# Altium PCB Main PCB.PcbDoc
Units mm, origin at the board's own origin, x right, y up, seen from the top; angles counter-clockwise.
Board outline 180.47 x 110.74 mm, 2 copper layers (Top Layer, Bottom Layer); 53 components, 45 nets, 175 pads, 63 vias.
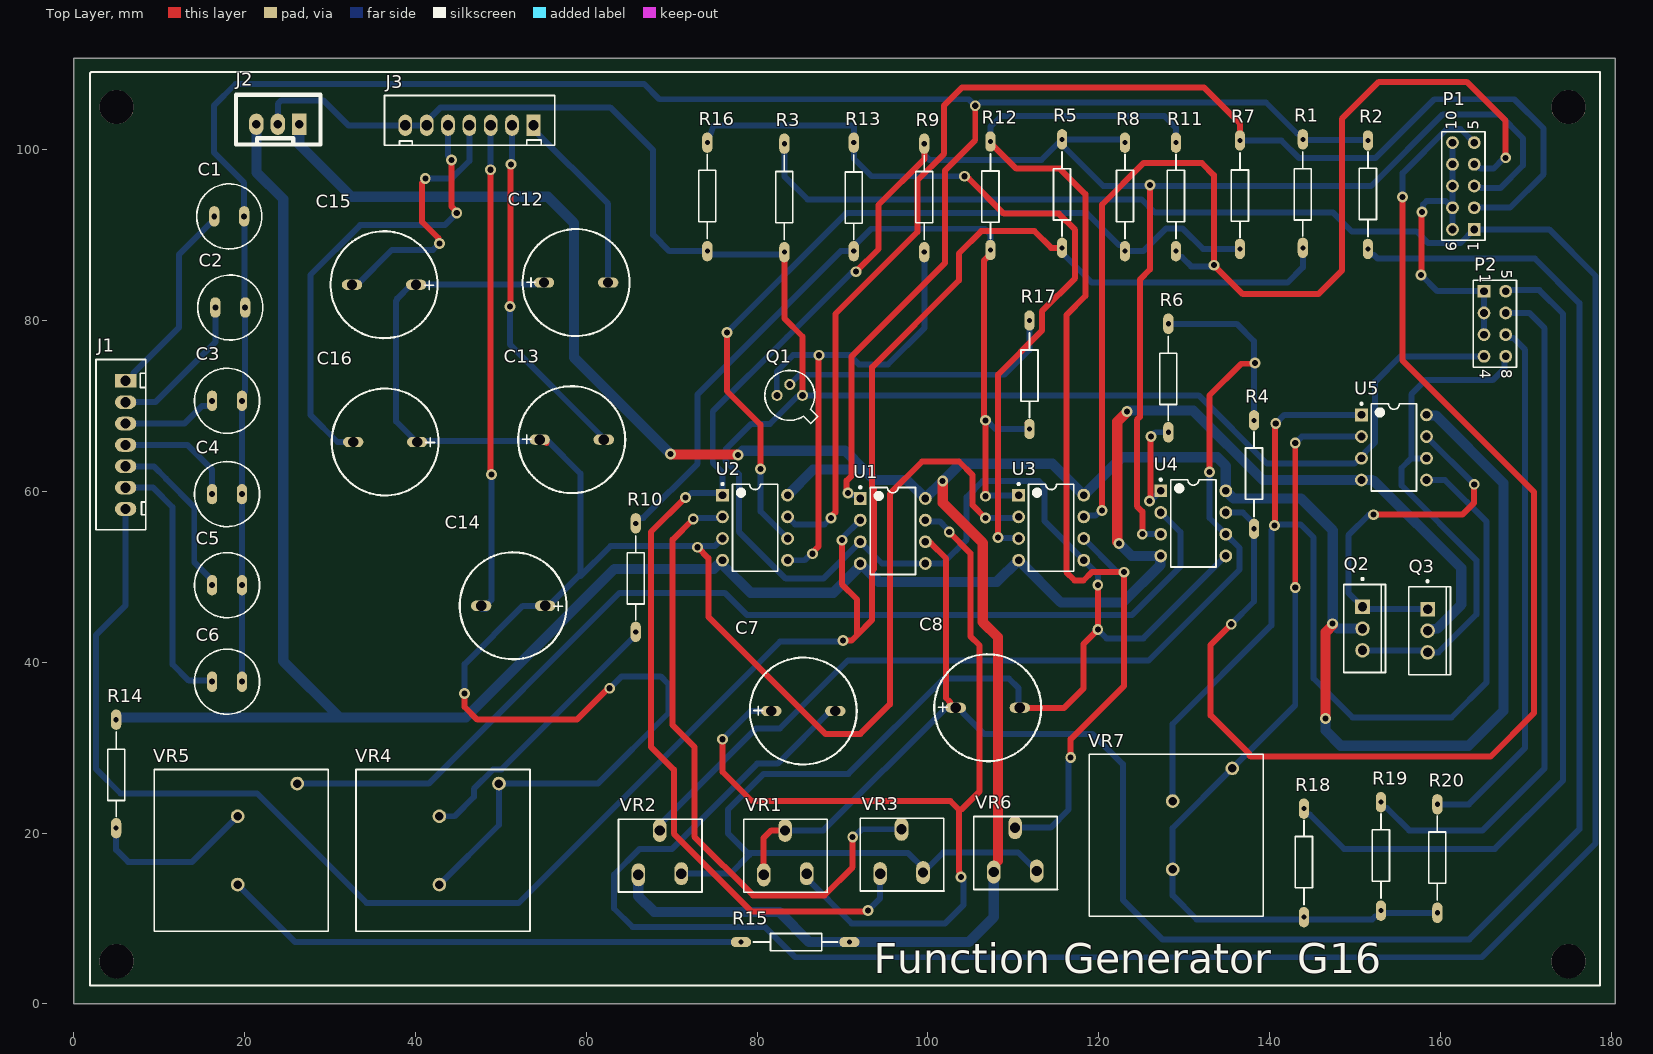
[diagram p0: Top Layer view]
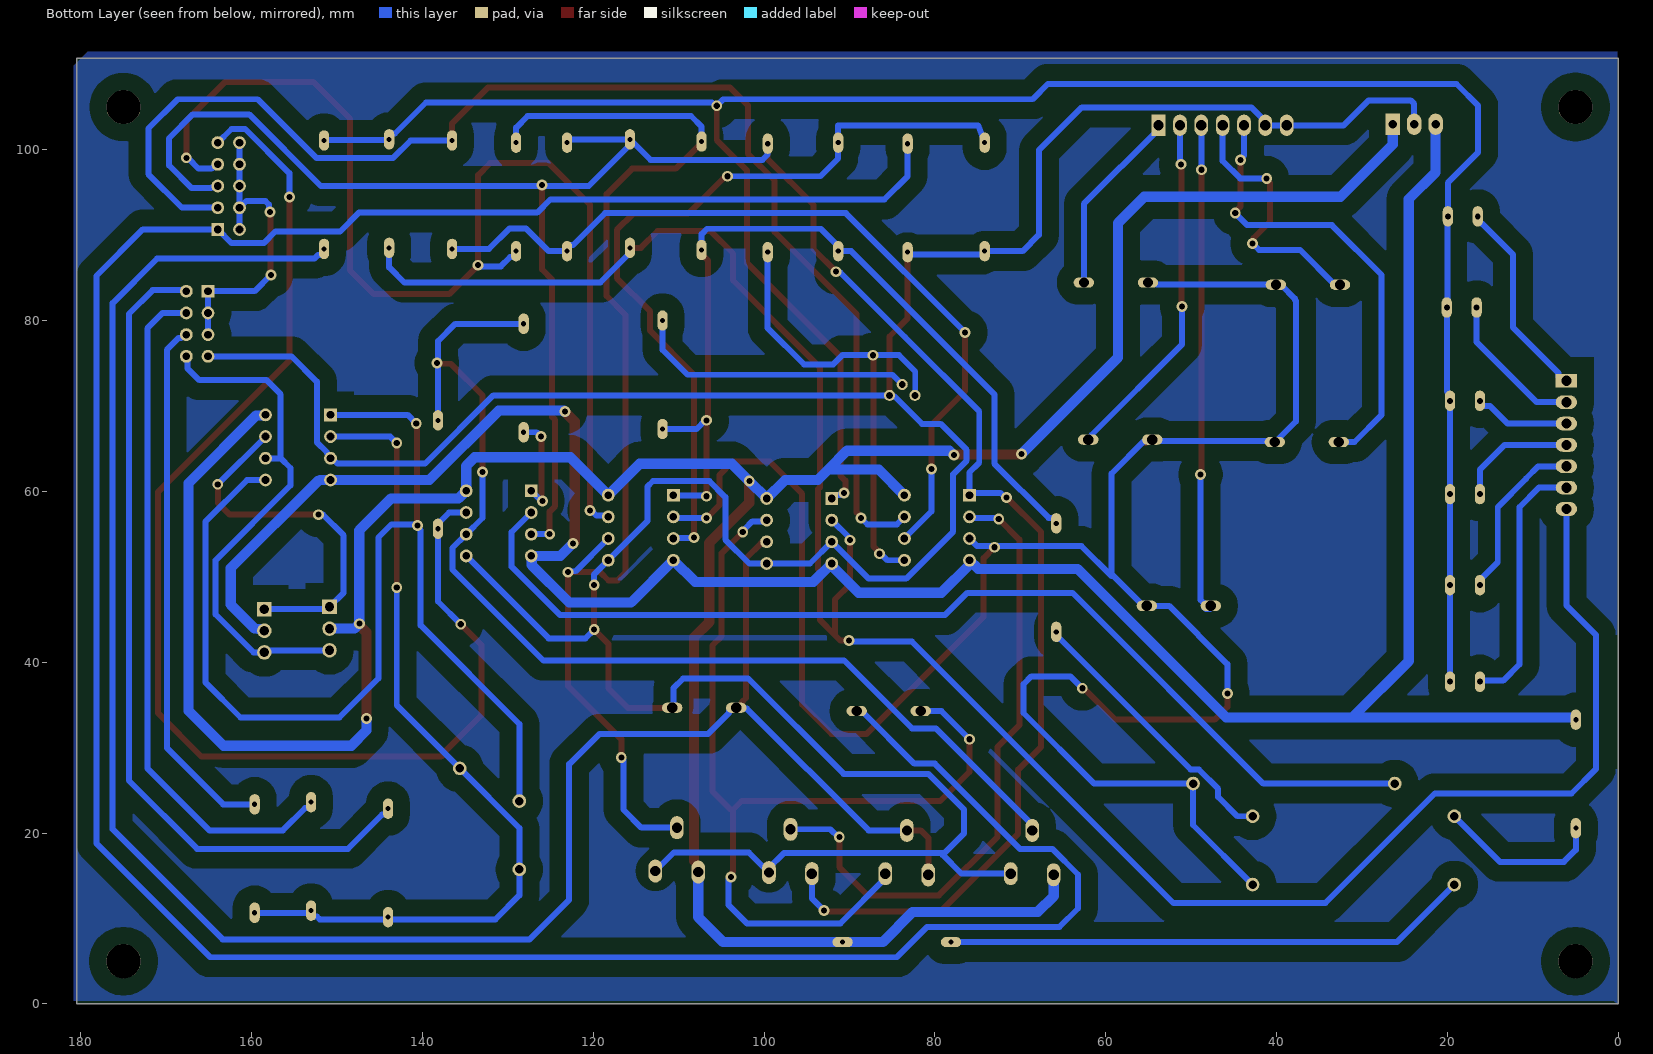
[diagram p1: Bottom Layer view, seen from below]
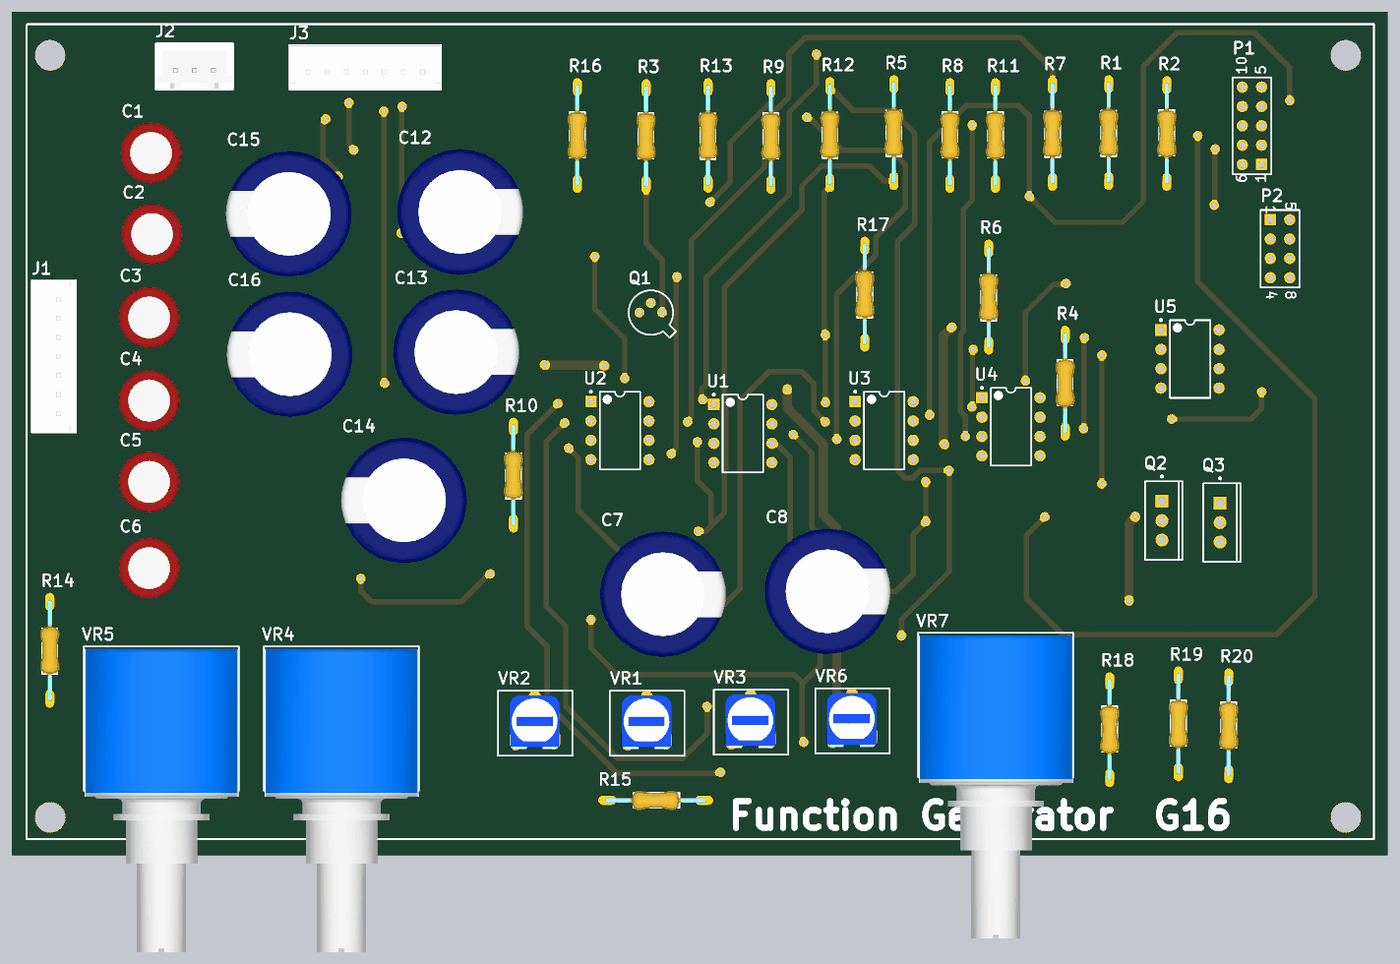
[diagram p2: 3D render of the assembled board from above, using the file's embedded part models]

## Layer stack, top to bottom
Top Solder: solder mask 0.0102, Solder Resist, Dk 3.5
Top Layer: signal copper 0.0356
Dielectric 1: dielectric 0.32, FR-4, Dk 4.8
Bottom Layer: signal copper 0.0356
Bottom Solder: solder mask 0.0102, Solder Resist, Dk 3.5

## Board outline
0,0 180.467,0 180.467,110.744 0,110.744

## Design rules (kind name [scope] priority, off if disabled: settings)
Clearance [All] p1: gap=0.5 ignorepadtopadclearanceinfootprint=FALSE
PolygonConnect [All] p1: connectstyle=Relief reliefconductorwidth=0.254 reliefentries=4 polygonreliefangle="90 Angle" airgapwidth=0.254
RoutingVias [All] p1: holewidth=0.711 width=1.27 viastyle="Through Hole" minholewidth=0.711 minwidth=1.27 maxholewidth=0.711 maxwidth=1.27
SolderMaskExpansion [All] p1: expansion=0.102 istentingtop=FALSE
Width [All] p1: maxlimit=1.2 minlimit=0.5 preferedwidth=0.7
30 further rules are at their usual default settings.

## Components (designator, comment, footprint, x,y, rotation, side; value= is the part's Value field where it differs from the comment)
C1 "Cap_NP" "Cap NP" 16.439,92.202 r0 top value=100u
C2 "Cap_NP" "Cap NP" 16.566,81.534 r0 top value=1u
C3 "Cap_NP" "Cap NP" 16.185,70.612 r0 top value=100n
C4 "Cap_NP" "Cap NP" 16.185,59.69 r0 top value=200p
C5 "Cap_NP" "Cap NP" 16.185,49.022 r0 top value=300p
C6 "Cap_NP" "Cap NP" 16.185,37.719 r0 top value=5n
C7 "Cap_pol" "Cap pol" 85.404,34.29 r0 top value=10u
C8 "Cap_pol" "Cap pol" 107.001,34.671 r0 top value=200p
C12 "Cap_pol" "Cap pol" 58.801,84.455 r0 top value=1u
C13 "Cap_pol" "Cap pol" 58.289,66.061 r0 top value=100n
C14 "Cap_pol" "Cap pol" 51.435,46.609 r180 top value=10n
C15 "Cap_pol" "Cap pol" 36.322,84.201 r180 top value=5n
C16 "Cap_pol" "Cap pol" 36.449,65.786 r180 top value=2n
J1 "JST_7p" JST_7p 6.061,72.945 r0 top
J2 "Jst" Jst_3p 26.376,102.997 r270 top
J3 "JST_7p" JST_7p 53.808,102.87 r270 top
P1 "Header 5X2A" HDR2X5_CEN 163.957,90.678 r90 top
P2 "Header 4X2A" HDR2X4_CEN 165.1,83.439 r270 top
Q1 "2N2222" MLTC-TO-18-3 83.82,71.247 r180 top
Q2 "TIP31G" ONSC-TO-220-3-221A-09 150.876,43.942 r0 top
Q3 "TIP32G" ONSC-TO-220-3-221A-09 158.496,43.688 r0 top
R1 "Res" Res 143.891,94.869 r90 top value=50k
R2 "Res" Res 151.511,94.742 r270 top value=1k
R3 "Res" Res 83.185,94.361 r270 top value=100k
R4 "Res" Res 138.176,61.976 r270 top value=1k
R5 "Res" Res 115.697,94.869 r90 top value=5k
R6 "Res" Res 128.143,73.279 r90 top value=10k
R7 "Res" Res 136.525,94.742 r90 top value=10k
R8 "Res" Res 123.063,94.488 r270 top value=10k
R9 "Res" Res 99.568,94.361 r270 top value=10k
R10 "Res" Res 65.786,49.911 r90 top value=10k
R11 "Res" Res 129.032,94.488 r270 top value=1k
R12 "Res" Res 107.315,94.615 r90 top value=10k
R13 "Res" Res 91.313,94.488 r90 top value=100k
R14 "Res" Res 4.953,26.924 r90 top value=50k
R15 "Res" Res 84.455,7.239 r180 top value=50k
R16 "Res" Res 74.168,94.488 r270 top value=700
R17 "Res" Res 111.887,73.66 r90 top value=100k
R18 "Res" Res 144.018,16.51 r270 top value=500
R19 "Res" Res 153.035,17.272 r270 top value=1k
R20 "Res" Res 159.639,17.018 r270 top value=10k
U1 "AD826ANZ" ADI-N-8 95.885,55.372 r0 top
U2 "AD826ANZ" ADI-N-8 79.756,55.753 r0 top
U3 "AD826ANZ" ADI-N-8 114.427,55.753 r0 top
U4 "AD826ANZ" ADI-N-8 131.064,56.261 r0 top
U5 "AD826ANZ" ADI-N-8 154.559,65.151 r0 top
VR1 "VRes" VerRes 79.497,17.463 r0 top value=10k
VR2 "VRes" VerRes 64.82,17.465 r0 top value=20k
VR3 "VRes" VerRes 93.126,17.597 r0 top value=100k
VR4 "POT_MT" "POT MT" 42.799,13.97 r90 top value=100k
VR5 "POT_MT" "POT MT" 19.177,13.97 r90 top value=10k
VR6 "VRes" VerRes 106.426,17.78 r0 top value=100
VR7 "POT_MT" "POT MT" 128.651,15.748 r90 top value=10k

## Footprints (in the part's own frame and the unit in brackets; to place one, negate y for a bottom-side part, rotate by r counter-clockwise, add the part's x,y. Pads: shape width x height; smd on the part's side, far side on the other; paste and mask are expansions set on the pad)
ADI-N-8 [mm] "DIP, 8-Leads, Body 9.59x6.6mm, Pitch 2.54mm"
  rect 1.5x1.5 hole 0.9: 1(-3.81,3.81)
  round 1.5 hole 0.9: 2(-3.81,1.27) 3(-3.81,-1.27) 4(-3.81,-3.81) 5(3.81,-3.81) 6(3.81,-1.27) 7(3.81,1.27) 8(3.81,3.81)
  silkscreen extent -3.93,-5.1 2.65,5.23, body extent -3.95,-5.07 3.95,5.07, height 5.33
"Cap NP" [mm]
  oval 1.2x2.388 hole 0.7: 1(0,0) 2(3.5,0)
  silkscreen extent -2.06,-3.81 5.56,3.81, body extent -2.2,-4 5.8,4, height 12
"Cap pol" [mm]
  oval 2.388x1.2 hole 1.2: 1(-3.75,0) 2(3.75,0)
  silkscreen extent -6.26,-6.26 6.26,6.26, body extent -8.25,-8.25 8.26,8.25, height 25.75
HDR2X4_CEN [mm] "Connector; Header; 4x2 Position"
  rect 1.5x1.5 hole 0.9: 1(0,0)
  round 1.5 hole 0.9: 2(2.54,0) 3(5.08,0) 4(7.62,0) 5(0,2.54) 6(2.54,2.54) 7(5.08,2.54) 8(7.62,2.54)
  silkscreen extent -1.27,-1.27 8.89,3.81
HDR2X5_CEN [mm] "Connector; Header; 5x2 Position"
  rect 1.5x1.5 hole 0.9: 1(0,0)
  round 1.5 hole 0.9: 2(2.54,0) 3(5.08,0) 4(7.62,0) 5(10.16,0) 6(0,2.54) 7(2.54,2.54) 8(5.08,2.54) 9(7.62,2.54) 10(10.16,2.54)
  silkscreen extent -1.27,-1.27 11.43,3.81
Jst_3p [mm]
  rect 2.5x1.7 hole 1: 1(0,0)
  oval 2.5x1.7 hole 1: 2(0,-2.5) 3(0,-5)
  silkscreen extent -3.45,-7.4 2.38,2.5, body extent -3.42,-7.4 2.33,2.5, height 7.01
JST_7p [mm]
  rect 2.5x1.6 hole 1.2: 1(0,0)
  oval 2.5x1.6 hole 1.2: 2(0,-2.5) 3(0,-5) 4(0,-7.5) 5(0,-10) 6(0,-12.5) 7(0,-15)
  silkscreen extent -3.47,-17.43 2.35,2.5, body extent -3.35,-17.4 2.4,2.5, height 7.01
MLTC-TO-18-3 [mm] "TO-18, 3-Leads"
  round 1.3 hole 0.8: 1(-1.485,0) 2(0,-1.27) 3(1.485,0)
  silkscreen extent -3.29,-2.92 2.92,3.29, body extent -3.29,-2.93 2.93,3.29, height 5.33
ONSC-TO-220-3-221A-09 [mm] "FM, 3-Leads, Body 10.3x4.85mm, Pitch 2.54mm"
  rect 1.7x1.7 hole 1.1: 1(0,2.54)
  round 1.7 hole 1.1: 2(0,0) 3(0,-2.54)
  silkscreen extent -2.2,-5.15 2.69,5.92, body extent -2.18,-5.15 2.67,5.15, height 19.85
"POT MT" [mm]
  round 1.6 hole 1: 1(0,0) 2(11.825,-6.975) 3(8,0)
  silkscreen extent -5.48,-10.6 13.48,9.77, body extent -26.66,-10.55 13.15,9.65, height 23.25
Res [mm]
  oval 2.388x1.2 hole 0.6: 1(-6.35,0) 2(6.35,0)
  silkscreen extent -5,-1 4.9,1, body extent -6.63,-1.27 6.63,1.27, height 2.79
VerRes [mm]
  oval 1.6x2.692 hole 1.2: 1(1.275,-2.35) 2(3.775,2.85) 3(6.3,-2.225)
  silkscreen extent -1.05,-4.37 8.75,4.15, body extent 0.5,-3.52 7,3.52, height 7.41

## Part data
J2: library part Jst_3p
P1: "Header, 5-Pin, Dual row", LatestRevisionDate=17-Jul-2002, LatestRevisionNote="Re-released for DXP Platform.", Publisher="Altium Limited"
P2: "Header, 4-Pin, Dual row", LatestRevisionDate=17-Jul-2002, LatestRevisionNote="Re-released for DXP Platform.", Publisher="Altium Limited"
Q1: library part CMP-2000-05237-1, "Low Power Bipolar NPN Transistor, 30 V, -65 to 200 degC, 3-Pin TO-18, RoHS, Bulk", Collector Emitter Voltage V(br)ceo=30V, Collector Emitter Voltage Vces=400mV, Continuous Collector Current Ic Max=800mA, Current Ic @ Vce Sat=150mA, DC Current Gain hFE=100, Full Power Rating Temperature=25degC, Manufacturer=Multicomp, Package / Case=TO-18, Package Description="3-Pin Transistor Outline Package (TO-18), Dia 5.54 mm, Pitch Pitch 1.485mm", Package Reference=TO-18-3, Power Dissipation Pd=500mW, Voltage Vcbo=60V, Current Ic Continuous a Max=800mA, Current Ic hFE=150mA, Datasheet URL=http://www.farnell.com/datasheets/1662272.pdf, Datasheet Version="Rev. 1.1, 05/2012", DC Collector Current=800mA, Gain Bandwidth ft Min=250MHz, Gain Bandwidth ft Typ=250MHz, Hfe Min=100, Manufacturer URL=http://uk.farnell.com/b/multicomp, No. of Pins=3, No. of Transistors=1, Pin Configuration=a, Power Dissipation Ptot Max=500mW, SVHC=NoSVHC(19-Dec-2012), Transistor Case Style=TO-18, Transistor Polarity=NPN
Q2: library part CMP-1048-01131-1, "Complementary Silicon Plastic Power Transistor, 3-Pin TO-220, Pb-Free, Tube", Manufacturer="On Semiconductor", ComponentLink1Description="Manufacturer URL", ComponentLink1URL=http://www.onsemi.com/, ComponentLink2Description=Datasheet, ComponentLink2URL=http://www.onsemi.com/pub_link/Collateral/TIP31A-D.PDF, ComponentLink3Description="Package Specification", ComponentLink3URL=http://www.onsemi.com/pub_link/Collateral/221A-09.PDF, DatasheetVersion="Rev. 14", fT Min (MHz)=3, IC Continuous (A)=3, Mounting Technology="Through Hole", PackageDescription="3-Pin Flange Mount, Vertical Straight Lead, Body 9.97 x 4.445 mm, Pitch 2.54 mm", PackageReference=TO-220-3-221A-09, PackageVersion="Rev. AG, 09/2011", Packing=Tube, PartNumber=TIP31G, Polarity=NPN, RoHS=TRUE
Q3: library part CMP-1048-01078-1, "Complementary Silicon Plastic Power Transistor, 3-Pin TO-220, Pb-Free, Tube", Manufacturer="On Semiconductor", ComponentLink1Description="Manufacturer URL", ComponentLink1URL=http://www.onsemi.com/, ComponentLink2Description=Datasheet, ComponentLink2URL=http://www.onsemi.com/pub_link/Collateral/TIP31A-D.PDF, ComponentLink3Description="Package Specification", ComponentLink3URL=http://www.onsemi.com/pub_link/Collateral/221A-09.PDF, DatasheetVersion="Rev. 14", fT Min (MHz)=3, IC Continuous (A)=3, Mounting Technology="Through Hole", PackageDescription="3-Pin Flange Mount, Vertical Straight Lead, Body 9.97 x 4.445 mm, Pitch 2.54 mm", PackageReference=TO-220-3-221A-09, PackageVersion="Rev. AG, 09/2011", Packing=Tube, PartNumber=TIP32G, Polarity=PNP, RoHS=TRUE
U1 U2 U3 U4 U5: library part CMP-0384-00249-1, "Double Channel Low Power Operational Amplifier, 50 MHz BW, 350 V/us SR, Industrial, 8-pin DIP (N-8), Tube", Amplifiers Per Package=2, Generic Part Number=AD826, Input Bias Current=3.3uA, Input Offset Voltage=500uV, Manufacturer="Analog Devices", Code_JEDEC=MS-001, ComponentLink1Description="Manufacturer URL", ComponentLink1URL=http://www.analog.com/en/index.html, ComponentLink2Description=Datasheet, ComponentLink2URL=http://www.analog.com/static/imported-files/data_sheets/AD826.pdf, ComponentLink3Description="Package Specification", ComponentLink3URL=http:/www.analog.com/static/imported-files/packages/PKG_PDF/PDIP(N)/N_8.pdf, DatasheetVersion="Rev. C", Iq/Amp=7.5mA, Mounting Technology="Through Hole", PackageDescription="8-Pin Plastic Dual In-Line Package, Row spacing 7.62 mm, Pitch 2.54 mm", PackageReference=N-8, PackageVersion=070606-A, PartNumber=AD826ANZ, Slew Rate=350V/us, Small Signal Bandwidth=50MHz, V Span Max=36V, V Span Min=5V

## Free pads (board coordinates)
  round 4 hole 4: 3(5,5) 4(175,5) 5(175,105) 6(5,105)

## Via types
v1: diameter 1.27, hole 0.711, Top Layer to Bottom Layer, 63 vias

## Nets (pads, with @x,y where several pads share a name; then routed paths per layer and width w, separated by ;. In a path a pad name is that pad's centre, name@x,y a point inside that pad or via, vN(x,y) a via of type N, cw(c..) or ccw(c..) an arc to the next point about the centre after c; other vN are vias at no path point)
FinalOUT: P2.8 Q2.3 Q3.3 U5.6 | length 60.6
  Bottom Layer w0.7: Q2.3 157.971,41.402 158.225,41.148 Q3.3 158.505,41.157 159.775,41.157 164.211,45.593 164.211,51.943 155.448,60.706 155.448,62.738 156.591,63.881 ; U5.6 156.591,63.881 ; P2.8 167.513,75.692 167.513,74.422 166.116,73.025 158.242,73.025 156.591,71.374 156.591,63.881
FreqCaps: C12.1 C13.1 C14.1 C15.1 C16.1 U2.3 U3.2 VR4.1 VR4.2 | length 261.9
  Top Layer w0.7: v1(45.753,36.355) 45.753,34.765 47.244,33.274 58.901,33.274 62.584,36.957 v1(62.738,36.957) ; C13.1@54.857,65.913 55.081,65.913 C13.1@55.312,65.682 ; v1(73.025,53.467) 74.295,52.197 74.295,45.314 87.986,31.623 92.075,31.623 95.529,35.077 95.529,59.715 99.314,63.5 103.632,63.5 105.234,61.898 105.234,58.381 v1(106.719,56.896)
  Bottom Layer w0.7: VR4.1 49.774,20.945 VR4.2 61.355,25.795 69.624,34.064 69.624,37.437 68.707,38.354 64.135,38.354 v1(62.738,36.957) ; v1(45.753,36.355) 45.753,39.784 52.578,46.609 C14.1 ; C12.1 54.322,84.455 54.068,84.201 C15.1 39.478,84.201 37.846,82.569 37.846,82.423 37.719,82.296 37.719,68.199 39.609,66.309 39.609,66.298 39.995,65.913 55.499,65.913 59.309,62.103 59.309,50.075 62.828,53.594 73.025,53.594 75.057,53.594 U2.3 ; C14.1@55.406,46.389 55.423,46.389 56.029,46.994 56.029,47.012 59.309,50.292 ; v1(106.719,56.896) 110.49,56.896 U3.2
GND: C8.2 J2.2 J3.6 J3.7 P2.4 Q1.1 R3.2 R16.2 U1.3 U1.5 U3.5 U4.5 U5.3 VR2.3 VR3.3 VR6.3 | length 407.8
  Top Layer w0.7: R3.2 83.185,80.264 85.305,78.144 85.305,73.153 85.32,73.138 85.32,71.262 Q1.1 ; C8.2 115.951,34.671 118.237,36.957 118.237,42.164 v1(119.888,43.815) v1(119.888,49.061)
  Bottom Layer w0.7: J2.2 23.876,105.381 24.286,105.791 29.21,105.791 32.131,102.87 J3.7 J3.6 41.308,103.32 42.958,104.97 62.797,104.97 67.818,99.949 67.818,90.043 69.723,88.138 R16.2 74.168,87.988 74.399,87.757 82.954,87.757 83.185,87.988 R3.2 ; VR2.3 76.886,15.24 79.096,17.45 78.892,17.653 ; C8.2 110.617,34.805 110.617,36.957 109.474,38.1 101.854,38.1 90.678,26.924 80.772,26.924 76.581,22.733 76.581,19.964 78.892,17.653 ; VR6.3 110.552,17.729 101.783,17.729 VR3.3 99.426,15.918 97.691,17.653 78.892,17.653 ; v1(119.888,43.815) 120.904,42.799 125.222,42.799 U4.5 ; v1(119.888,49.061) 119.888,50.292 U3.5 113.665,56.515 113.665,60.55 113.001,61.214 106.397,61.214 104.521,59.338 104.521,54.356 101.727,51.562 U1.5 94.615,51.562 U1.3 87.757,49.784 83.363,49.784 77.865,55.282 77.865,62.013 76.278,63.6 76.278,64.877 79.312,67.911 81.5,67.911 84.721,71.132 85.19,71.132 Q1.1 131.699,71.247 139.7,63.246 149.939,63.246 150.574,63.881 U5.3 150.749,64.097 151.149,64.497 151.149,64.558 152.349,65.758 152.349,72.847 155.321,75.819 P2.4
NetC1_1: C1.1 J1.1 | length 23.9
  Bottom Layer w0.7: J1.1 6.511,72.945 6.961,73.395 6.961,73.845 12.319,79.203 12.319,87.757 15.92,91.358 16.054,91.358 16.439,91.743 C1.1
NetC2_1: C2.1 J1.2 | length 17.5
  Bottom Layer w0.7: J1.2 9.541,70.445 16.566,77.47 C2.1
NetC3_1: C3.1 J1.3 | length 11.6
  Bottom Layer w0.7: J1.3 12.929,67.945 15.011,70.028 16.185,70.028 C3.1
NetC4_1: C4.1 J1.4 | length 14.2
  Bottom Layer w0.7: J1.4 13.295,65.445 16.185,62.555 C4.1
NetC5_1: C5.1 J1.5 | length 20.1
  Bottom Layer w0.7: J1.5 9.369,62.945 10.795,61.519 10.795,61.468 14.097,58.166 14.097,51.704 16.185,49.616 C5.1
NetC6_1: C6.1 J1.6 | length 30.3
  Bottom Layer w0.7: J1.6 9.278,60.445 11.557,58.166 11.557,39.751 13.462,37.846 16.058,37.846 C6.1
NetC7_1: C7.1 U1.7 VR1.3 | length 111.6
  Top Layer w0.7: v1(75.946,30.988) 75.946,27.178 79.375,23.749 102.616,23.749 103.632,22.733 103.632,15.516 103.777,15.371 103.777,14.968 v1(103.886,14.859) ; v1(102.489,55.245) 104.972,52.762 104.972,43.033 106.045,41.96 106.045,24.892 103.886,22.733
  Bottom Layer w0.7: v1(75.946,30.988) 79.248,34.29 C7.1 ; VR1.3 85.797,14.692 91.052,9.437 102.02,9.437 104.14,11.557 104.14,14.605 v1(103.886,14.859) ; U1.7 99.848,56.489 101.372,56.489 v1@102.235,55.626
NetC8_1: C8.1 R2.2 U1.6 VR1.1 VR1.2 | length 242.8
  Top Layer w0.7: VR1.1 80.772,19.431 81.654,20.313 VR1.2 ; U1.6 99.848,53.949 100.331,53.949 102.108,52.172 102.108,35.814 102.562,35.36 102.562,34.902 102.792,34.671 C8.1
  Bottom Layer w0.7: VR1.2 87.75,20.313 102.012,34.575 103.155,34.575 C8.1 103.71,34.671 104.095,34.286 104.095,34.081 106.553,31.623 119.253,31.623 122.809,28.067 122.809,12.192 127.451,7.55 163.379,7.55 176.276,20.447 176.276,82.042 171.069,87.249 152.654,87.249 152.2,87.703 151.742,87.703 151.511,87.933 R2.2
NetC12_2: C12.2 J3.1 | length 22
  Bottom Layer w0.7: J3.1 53.808,102.42 62.551,93.677 C12.2
NetC13_2: C13.2 J3.2 | length 42.2
  Top Layer w0.7: v1(51.054,81.661) 50.927,81.661 51.117,81.852 51.117,98.234 v1(51.181,98.298)
  Bottom Layer w0.7: v1(51.054,81.661) 51.054,77.216 61.668,66.602 61.668,66.144 61.898,65.913 C13.2@62.357,65.913 ; v1(51.181,98.298) 51.181,98.425 51.308,98.552 J3.2
NetC14_2: C14.2 J3.3 | length 57.4
  Top Layer w0.7: v1(48.768,97.663) 48.768,97.418 48.786,97.4 48.786,62.085 v1(48.895,61.976)
  Bottom Layer w0.7: C14.2@47.812,46.228 48.27,46.228 48.501,46.459 48.501,46.917 48.895,47.311 v1(48.895,61.976) ; v1(48.768,97.663) 48.788,97.683 48.788,102.85 J3.3
NetC15_2: C15.2 J3.4 | length 31
  Top Layer w0.7: v1(41.148,96.647) 41.148,96.493 40.767,96.112 40.767,91.567 42.69,89.644 42.69,89.136 v1(42.799,89.027)
  Bottom Layer w0.7: C15.2 33.166,84.201 37.23,88.265 42.037,88.265 v1(42.799,89.027) ; v1(41.148,96.647) 44.264,96.647 46.308,98.691 J3.4
NetC16_2: C16.2 J3.5 | length 53.6
  Top Layer w0.7: v1(44.196,98.806) 44.196,93.372 44.831,92.737 v1(44.831,92.583)
  Bottom Layer w0.7: C16.2 30.861,65.786 27.686,68.961 27.686,85.344 33.528,91.186 43.434,91.186 v1(44.831,92.583) ; J3.5 43.808,99.348 44.196,98.96 v1(44.196,98.806)
NetP2_5: P2.5 R18.1 | length 98.4
  Bottom Layer w0.7: R18.1 144.018,22.401 144.249,22.171 144.707,22.171 148.717,18.161 166.37,18.161 174.371,26.162 174.371,80.772 171.577,83.566 167.767,83.566 P2.5
NetP2_6: P2.6 R19.1 | length 80.6
  Bottom Layer w0.7: R19.1 153.035,23.163 153.266,22.933 153.724,22.933 156.337,20.32 164.944,20.32 172.212,27.588 172.212,79.092 170.405,80.899 P2.6
NetP2_7: P2.7 R20.1 | length 62.7
  Bottom Layer w0.7: R20.1 163.322,23.368 169.926,29.972 169.926,76.581 168.53,77.977 168.239,77.977 167.856,78.359 P2.7
NetQ1_2: Q1.2 R17.2 | length 33.2
  Bottom Layer w0.7: Q1.2 84.963,73.66 108.966,73.66 111.887,76.581 R17.2
NetQ1_3: Q1.3 R9.2 U2.5 | length 58.8
  Top Layer w0.7: v1(86.487,52.705) 86.487,52.859 87.161,53.533 87.161,75.858 v1(87.249,75.946)
  Bottom Layer w0.7: Q1.3 82.296,71.247 82.296,74.041 84.201,75.946 v1(87.249,75.946) 90.831,75.946 91.898,74.879 95.326,74.879 99.568,79.121 R9.2 ; U2.5 85.571,51.943 86.333,52.705 v1(86.487,52.705)
NetQ2_1: Q2.1 Q3.1 U5.7 | length 43.4
  Top Layer w0.7: v1(152.146,57.277) 162.56,57.277 163.957,58.674 v1(163.957,60.833)
  Bottom Layer w0.7: v1(152.146,57.277) 151.638,57.277 149.225,54.864 149.225,48.133 Q2.1 151.13,46.228 Q3.1 ; U5.7 v1(163.957,60.833) v1@164.211,60.833
NetR4_1: R4.1 R6.2 U4.6 VR2.2 | length 129.8
  Top Layer w0.7: v1(132.969,62.273) 132.969,71.247 136.67,74.948 138.194,74.948 v1(138.303,75.057)
  Bottom Layer w0.7: VR2.2 68.595,20.97 79.883,32.258 82.677,32.258 90.627,40.208 125.831,40.208 136.474,50.851 136.474,53.391 U4.6 132.969,56.896 v1(132.969,62.273) ; R6.2 136.144,79.629 138.176,77.597 138.176,75.057 R4.1
NetR6_1: R6.1 U4.1 | length 11.6
  Top Layer w0.7: v1(125.945,58.887) 126.028,58.97 126.028,66.338 v1(126.111,66.421)
  Bottom Layer w0.7: v1(125.945,58.887) 126.07,58.887 U4.1 ; v1(126.111,66.421) 126.619,66.929 R6.1
NetR7_1: R7.1 R8.2 U2.6 | length 97.1
  Top Layer w0.7: v1(76.454,78.613) 76.454,71.755 80.391,67.818 v1(80.391,62.611)
  Bottom Layer w0.7: v1(76.454,78.613) 90.424,92.583 118.618,92.583 122.374,88.827 122.832,88.827 123.063,88.597 R8.2 125.222,88.138 127.889,90.805 129.794,90.805 132.207,88.392 R7.1 ; v1(80.391,62.611) 80.391,57.658 U2.6
NetR10_1: R10.1 VR4.3 | length 32.8
  Bottom Layer w0.7: VR4.3 44.576,21.97 46.833,24.227 46.833,25.188 49.091,27.445 50.051,27.445 65.323,42.717 65.401,42.717 65.786,43.102 R10.1
NetR11_1: R11.1 R12.2 U3.6 VR6.2 | length 136.7
  Top Layer w0.7: R12.2 107.315,100.815 110.34,97.79 115.443,97.79 118.434,94.799 118.434,82.874 116.205,80.645 116.205,50.546 117.185,49.566 118.205,49.566 119.185,50.546 v1(122.936,50.546) 122.936,37.211 116.713,30.988 v1(116.713,28.829)
  Bottom Layer w0.7: R12.2 107.315,102.718 108.553,103.956 127.667,103.956 129.032,102.591 R11.1 ; VR6.2 114.356,20.63 116.459,22.733 116.459,28.575 v1(116.713,28.829) ; U3.6 122.065,50.655 122.827,50.655 v1(122.936,50.546)
NetR13_2: R13.2 R16.1 U3.3 | length 94
  Top Layer w0.7: v1(104.267,96.901) 104.421,96.901 104.706,96.616 104.806,96.616 108.89,92.532 115.321,92.532 117.234,90.619 117.234,84.976 113.337,81.079 113.337,78.816 108.204,73.683 v1(108.204,54.61)
  Bottom Layer w0.7: R16.1 74.93,102.87 91.313,102.87 91.313,98.984 93.396,96.901 v1(104.267,96.901) ; v1(108.204,54.61) 108.267,54.546 110.553,54.546 U3.3
NetR14_1: R14.1 VR5.3 | length 19.4
  Bottom Layer w0.7: R14.1@4.953,20.423 4.953,18.034 6.35,16.637 13.844,16.637 VR5.3
NetR15_2: R15.2 VR5.1 | length 61.7
  Bottom Layer w0.7: VR5.1 25.908,7.239 R15.2
NetR18_2: R18.2 R19.2 R20.2 U5.2 VR7.1 VR7.2 | length 100.3
  Top Layer w0.7: v1(143.002,48.768) v1(143.002,65.659)
  Bottom Layer w0.7: v1(143.002,48.768) 143.002,34.949 VR7.2 128.651,20.598 VR7.1 128.651,12.7 131.445,9.906 143.787,9.906 R18.2@144.018,10.137 ; v1(143.002,65.659) 143.764,66.421 U5.2 ; R18.2 R18.2@144.018,10.137 ; R20.2 153.035,10.668 R19.2 153.035,10.463 152.804,10.233 152.346,10.233 152.019,9.906 144.249,9.906 R18.2@144.018,10.137
NetU2_2: U2.2 VR3.2 | length 76
  Top Layer w0.7: v1(72.517,56.769) 70.104,54.356 70.104,32.639 72.644,30.099 72.644,19.583 79.527,12.7 87.884,12.7 91.186,16.002 v1(91.186,19.558) ; VR3.2@96.485,19.756 96.901,20.172 VR3.2
  Bottom Layer w0.7: v1(72.517,56.769) 72.626,56.878 75.801,56.878 U2.2 ; v1(91.186,19.558) 91.34,19.558 92.229,20.447 VR3.2
NetU4_2: U4.2 VR5.2 | length 123.3
  Bottom Layer w0.7: VR5.2 41.543,25.795 63.881,48.133 76.2,48.133 78.793,45.54 123.899,45.54 129.54,51.181 129.54,55.245 U4.2
NetU5_1: U5.1 U5.5 VR7.3 | length 133.1
  Top Layer w0.7: v1(140.589,56.007) 140.653,56.07 140.653,67.882 v1(140.716,67.945)
  Bottom Layer w0.7: VR7.3 128.651,32.766 140.208,44.323 140.208,55.472 140.589,55.853 v1(140.589,56.007) 140.698,56.116 142.252,56.116 142.27,56.134 143.637,56.134 145.161,54.61 145.161,38.1 149.733,33.528 161.29,33.528 165.411,37.649 165.411,56.458 160.528,61.341 U5.5 ; v1(140.716,67.945) 141.732,68.961 U5.1
Out1: R10.2 R12.1 R13.1 R17.1 U3.1 | length 103.6
  Top Layer w0.7: v1(106.719,59.436) v1(106.719,68.326) ; v1@106.982,68.326 106.873,68.326 106.553,68.646 106.553,87.011 107.315,87.773 R12.1 ; U3.1 U3.1@111.017,59.963 ; R17.1@111.656,67.999 111.887,67.769 R17.1
  Bottom Layer w0.7: R10.2 65.786,56.667 66.017,56.898 66.677,56.898 73.025,63.246 73.025,71.374 89.789,88.138 R13.1 91.481,88.306 91.481,88.89 93.345,90.754 106.68,90.754 107.315,90.119 R12.1 ; v1(106.719,59.436) 106.782,59.499 110.553,59.499 U3.1 ; v1(106.719,68.326) 106.873,68.326 107.889,67.31 R17.1
OUTstage: P1.6 P1.7 P1.8 P1.9 P1.10 P2.1 P2.2 P2.3 | length 35.7
  Top Layer w0.7: v1(157.734,85.344) 157.797,85.407 157.797,92.647 v1(157.861,92.71)
  Bottom Layer w0.7: v1(157.734,85.344) 159.639,83.439 P2.1 P2.2 P2.3 ; v1(157.861,92.71) 157.97,92.819 157.97,93.594 158.38,94.004 160.607,94.004 161.393,93.218 P1.7 ; P1.6 P1.7 ; P1.10 P1.9 P1.8 P1.7
PWM: P1.5 R4.2 U4.7 | length 151.3
  Top Layer w0.7: v1(135.509,44.45) 133.096,42.037 133.096,33.782 137.668,29.21 137.668,29.086 137.798,28.956 165.862,28.956 170.942,34.036 170.942,59.944 155.575,75.311 v1(155.575,94.488)
  Bottom Layer w0.7: U4.7 136.865,57.531 138.176,56.22 R4.2 138.176,47.117 v1(135.509,44.45) ; R4.2@137.922,55.548 R4.2@137.922,55.626 ; v1(155.575,94.488) 155.575,97.259 160.754,102.438 162.357,102.438 P1.5
Sawtooth: P1.2 R7.2 U2.7 | length 154.6
  Top Layer w0.7: v1(88.646,56.896) 88.646,57.05 89.154,57.558 89.154,80.772 98.755,90.373 98.755,96.398 101.898,99.54 101.898,105.2 104.013,107.315 132.309,107.315 136.525,103.099 R7.2
  Bottom Layer w0.7: U2.7 84.455,56.134 87.884,56.134 v1(88.646,56.896) ; R7.2 141.374,101.092 143.417,99.048 152.411,99.048 159.281,105.918 168.656,105.918 172.085,102.489 172.085,97.155 168.148,93.218 P1.2
SinCap1: J1.7 R1.1 R5.1 U1.2 | length 252.8
  Top Layer w0.7: v1(89.916,54.292) 89.916,49.149 91.694,47.371 91.694,43.18 ; v1(90.043,42.545) 91.059,42.545 91.694,43.18 ; R5.1 114.427,88.519 112.471,90.475 106.223,90.475 103.632,87.884 103.632,84.709 93.472,74.549 93.472,60.487 93.675,60.284 93.675,50.899 93.472,50.696 93.472,44.958 91.694,43.18
  Bottom Layer w0.7: J1.7 6.061,46.655 2.614,43.208 2.614,27.485 5.461,24.638 21.463,24.638 34.29,11.811 52.07,11.811 82.677,42.418 v1@90.297,42.418 ; v1(89.916,54.292) 89.916,54.483 U1.2 ; R5.1 115.697,87.925 119.167,84.455 142.113,84.455 143.891,86.233 R1.1
SinCap2: C1.2 C2.2 C3.2 C4.2 C5.2 C6.2 R1.2 R2.1 U1.1 | length 261.8
  Top Layer w0.7: v1(90.639,59.817) 90.475,59.981 90.475,61.268 91.059,61.852 91.059,75.819 101.969,86.729 101.969,97.567 105.537,101.135 v1(105.537,105.156)
  Bottom Layer w0.7: C6.2 C5.2 C4.2 C3.2 19.685,71.341 20.066,71.722 C2.2 20.002,81.597 20.002,92.138 C1.2 19.939,96.139 16.383,99.695 16.383,105.156 18.923,107.696 66.777,107.696 68.555,105.918 104.775,105.918 v1(105.537,105.156) ; v1(90.639,59.817) 90.793,59.817 91.028,59.582 91.675,59.582 U1.1 ; v1@105.691,105.156 106.072,105.537 139.573,105.537 143.202,101.908 143.66,101.908 143.891,101.678 R1.2 143.954,101.155 151.447,101.155 R2.1
Sine: C7.2 P1.1 R3.1 | length 332.4
  Top Layer w0.7: R3.1@82.954,100.457 83.185,100.688 R3.1
  Bottom Layer w0.7: R3.1 83.185,96.901 85.909,94.177 125.025,94.177 126.569,92.633 147.434,92.633 149.642,90.424 150.899,90.424 150.91,90.436 157.214,90.436 158.572,89.078 162.357,89.078 P1.1 172.72,90.678 178.181,85.217 178.181,18.796 164.846,5.461 84.455,5.461 80.899,9.017 65.405,9.017 63.246,11.176 63.246,15.146 66.219,18.119 70.006,18.119 80.011,28.124 82.394,28.124 88.56,34.29 C7.2
Square: P1.4 R11.2 U3.7 | length 136.9
  Top Layer w0.7: v1(120.396,57.785) 120.396,93.599 125.222,98.425 132.08,98.425 133.477,97.028 v1(133.477,86.487) 136.87,83.094 145.705,83.094 148.463,85.852 148.463,103.632 152.781,107.95 163.068,107.95 167.64,103.378 v1(167.64,99.06)
  Bottom Layer w0.7: U3.7 118.39,57.176 119.633,57.176 120.242,57.785 v1(120.396,57.785) ; R11.2 129.032,87.679 129.263,87.449 129.721,87.449 130.81,86.36 v1@133.604,86.36 ; P1.4 164.173,98.298 164.681,97.79 166.216,97.79 167.377,98.951 v1@167.622,98.951
Triangular: P1.3 R5.2 R8.1 R9.1 U2.1 U4.3 VR3.1 | length 272.1
  Top Layer w0.7: v1(71.628,59.309) 67.564,55.245 67.564,30.099 70.245,27.418 70.245,19.925 79.375,10.795 v1@92.701,10.795 ; v1(91.567,85.725) 94.209,88.367 94.209,93.548 99.568,98.908 R9.1 ; VR3.1@94.401,14.707 VR3.1 ; v1(125.095,54.991) 125.095,57.637 124.46,58.272 124.46,68.385 124.802,68.727 124.802,84.797 125.984,85.979 v1(125.984,95.885)
  Bottom Layer w0.7: v1(71.628,59.309) 71.782,59.309 72.29,59.817 75.692,59.817 U2.1 75.946,59.817 75.946,62.235 74.803,63.378 74.803,69.367 83.499,78.063 91.052,85.616 91.458,85.616 v1(91.567,85.725) ; v1(92.964,10.922) 94.401,12.359 VR3.1 ; R9.1 99.568,99.441 100.203,98.806 113.284,98.806 R5.2@115.506,101.028 ; R8.1 123.063,100.988 122.832,101.219 R5.2 115.697,100.584 120.523,95.758 151.892,95.758 160.274,104.14 166.878,104.14 169.672,101.346 169.672,98.171 167.005,95.504 164.767,95.504 164.666,95.605 163.888,95.605 P1.3@163.787,95.504 ; v1(125.095,54.991) U4.3
Vcc+: J2.1 Q2.2 R15.1 U1.8 U2.8 U3.8 U4.8 U5.8 VR2.1 VR6.1 | length 361.9
  Top Layer w0.7: v1(69.85,64.389) v1@69.913,64.325 ; v1@77.699,64.325 v1(77.763,64.262) ; VR6.1 107.701,16.22 108.204,16.723 ; v1@147.383,44.359 v1(147.383,44.514)
  Top Layer w1.2: v1@69.913,64.325 v1@77.699,64.325 ; v1(101.727,61.214) 101.727,58.674 106.426,53.975 106.426,44.704 108.204,42.926 108.204,16.723 ; v1(146.558,33.401) 146.558,43.534 v1@147.383,44.359
  Bottom Layer w1.2: J2.1 26.376,100.624 32.512,94.488 55.499,94.488 58.547,91.44 58.547,75.692 v1(69.85,64.389) ; VR2.1 66.095,12.62 67.945,10.77 82.575,10.77 86.106,7.239 R15.1 104.775,7.239 107.701,10.165 VR6.1 ; v1(77.763,64.262) 77.782,64.262 78.29,64.77 90.297,64.77 92.498,62.569 ; U2.8 86.572,62.569 92.498,62.569 ; v1(146.558,33.401) 146.558,32.004 148.336,30.226 163.293,30.226 167.386,34.319 167.386,60.96 159.442,68.904 158.426,68.904 U5.8 ; Q2.2 147.955,43.942 v1(147.383,44.514) 147.383,55.435 143.637,59.182 135.763,59.182 U4.8 134.874,62.992 133.858,64.008 122.682,64.008 U3.8 114.554,63.246 103.759,63.246 v1(101.727,61.214) U1.8 97.536,61.341 93.726,61.341 92.498,62.569
Vcc-: J2.3 Q3.2 R14.2 U1.4 U2.4 U3.4 U4.4 U5.4 | length 291.5
  Top Layer w1.2: v1(122.364,53.911) 122.364,53.93 122.174,54.121 122.174,68.18 123.317,69.323 v1(123.317,69.342)
  Bottom Layer w0.7: 151.981,61.341 152.108,61.214 152.273,61.214 ; Q3.2 Q3.2@158.687,43.879 ; Q3.2@159.246,43.879 159.308,43.942 159.546,43.942
  Bottom Layer w1.2: R14.2@4.953,33.528 31.115,33.528 ; J2.3 21.376,97.369 24.511,94.234 24.511,40.132 31.115,33.528 ; v1(122.364,53.911) 123.825,52.451 U4.4 127.197,52.394 127.197,51.378 122.809,46.99 115.57,46.99 U3.4 108.077,49.403 94.234,49.403 U1.4 92.018,51.505 92.018,51.232 88.919,48.133 79.248,48.133 76.003,51.378 76.003,51.886 U2.4 74.93,50.927 63.297,50.927 45.898,33.528 31.115,33.528 ; v1(123.317,69.342) 123.336,69.342 123.463,69.469 131.064,69.469 139.192,61.341 U5.4 151.981,61.341 ; 152.273,61.214 162.446,51.041 162.446,46.749 159.639,43.942 159.546,43.942 ; Q3.2@158.687,43.879 Q3.2@159.246,43.879

## Polygon pours and split planes (outlines as drawn)
GND on Bottom Layer "GND_L02_P000" (solid, pour order 0): -0.127,-0.254 0.508,0.381 180.848,0.381 180.848,109.855 179.197,111.506 0.127,111.506 0.127,0.254 0,0.127

## Silkscreen, mask and mechanical layers (free items; w line width, h text height)
Top Overlay:
  lines w0.254: 1.905,2.159 1.905,108.966 2.032,109.093 178.689,109.093 178.689,2.159 1.905,2.159
  text "Function Generator  G16" at 93.637,3.594 h3.5

## Text inside footprints (layer, text, board x,y; h text height)
P1: Top Overlay "6" at 161.925,88.138 h1.27 r90; Top Overlay "10" at 161.925,102.362 h1.27 r90; Top Overlay "5" at 164.465,102.362 h1.27 r90; Top Overlay "1" at 164.465,88.138 h1.27 r90
P2: Top Overlay "8" at 167.132,74.295 h1.27 r270; Top Overlay "4" at 164.592,74.295 h1.27 r270; Top Overlay "1" at 164.592,85.471 h1.27 r270; Top Overlay "5" at 167.132,85.979 h1.27 r270